# EAGLE board CapSiem (EAGLE 3.55)

No outline drawn. Coordinates in mm, seen from the top.
Copper layers used: 

## Footprints (pad centres in the part's own frame; a part is rotated, then mirrored left to right if it is on the bottom)
1306-1 = drill 1.422 pad 3.81 round:  5.2,-5.08;  5,5 | drill 1.422 pad 3.81 octagon:  -7.7,0.08
1306-2 = drill 1.422 pad 3.81 round:  10,0;  0,7.5;  0,-7.5 | drill 1.422 pad 3.81 octagon:  -7.5,0
1306-3 = drill 1.422 pad 3.81 octagon:  -12.58,0 | drill 1.422 pad 3.81 round:  -5.08,7.5;  -5.08,-7.5;  4.92,0
1336-1 = drill 0.813 pad 2.54 round:  -2.5,-3.75;  0,3.75 | drill 0.813 pad 2.54 octagon:  2.5,-3.75
1336-2 = drill 0.813 pad 2.54 round:  -3.75,-3.75;  0,6.25 | drill 0.813 pad 2.54 octagon:  3.75,-3.75
1336-3 = drill 0.813 pad 2.54 round:  -3.75,-3.75;  0,6.25 | drill 0.813 pad 2.54 octagon:  3.75,-3.75
3306-1 = drill 1.422 pad 3.81 round:  -1.38,-7.62;  8.5,0;  -1.5,7.5 | drill 1.422 pad 3.81 octagon:  -9.12,0.12
3306-2 = drill 1.422 pad 3.81 octagon:  -12.7,0 | drill 1.422 pad 3.81 round:  -5.2,7.5;  -5.2,-7.5;  4.8,0
B6 = drill 0.813 pad 1.93 round:  -2.54,-2.54;  2.54,2.54
B8 = drill 0.813 pad 1.778 round:  2.54,2.54;  -2.54,-2.54
0B10 = drill 0.813 pad 1.93 round:  -3.81,-3.81;  3.81,3.81
3B13 = drill 0.813 pad 1.93 round:  -5.08,-5.08;  5.08,5.08

## Placement (x,y rotation side)
B41306-1  [1306-1]  92.71,231.14 0 top
B41306-2  [1306-2]  123.19,231.14 0 top
B41306-3  [1306-3]  163.83,231.14 0 top
B41336-1  [1336-1]  27.94,149.86 0 top
B41336-2  [1336-2]  55.88,149.86 0 top
B41336-3  [1336-3]  86.36,149.86 0 top
B43306-1  [3306-1]  33.02,190.5 0 top
B43306-2  [3306-2]  72.39,190.5 0 top
C6B6  [B6]  20.32,231.14 0 top
C8B8  [B8]  30.48,231.14 0 top
C10B10  [0B10]  43.18,231.14 0 top
C13B13  [3B13]  58.42,231.14 0 top
ST1  [-35SC]  0,0 0 top

## Library data of the parts
B41306-1-B41306-3 B41336-1-B41336-3 B43306-1 B43306-2 = CapSiem
C6B6 C8B8 C10B10 C13B13 = cap-siem
ST1 = BLATT